# Altium PCB SPT3G_LCBoardRev5.PcbDoc (part 4 of 4)
Units mil, origin at the board's own origin, x right, y up, seen from the top; angles counter-clockwise.
Board outline 7275.33 x 1969 mil, 6 copper layers (Top Layer, Signal Layer 1, Internal Plane 1, Internal Plane 2, Signal Layer 2, Bottom Layer), stack 61.6 mil thick; 26 components, 141 nets, 668 pads, 146 vias.
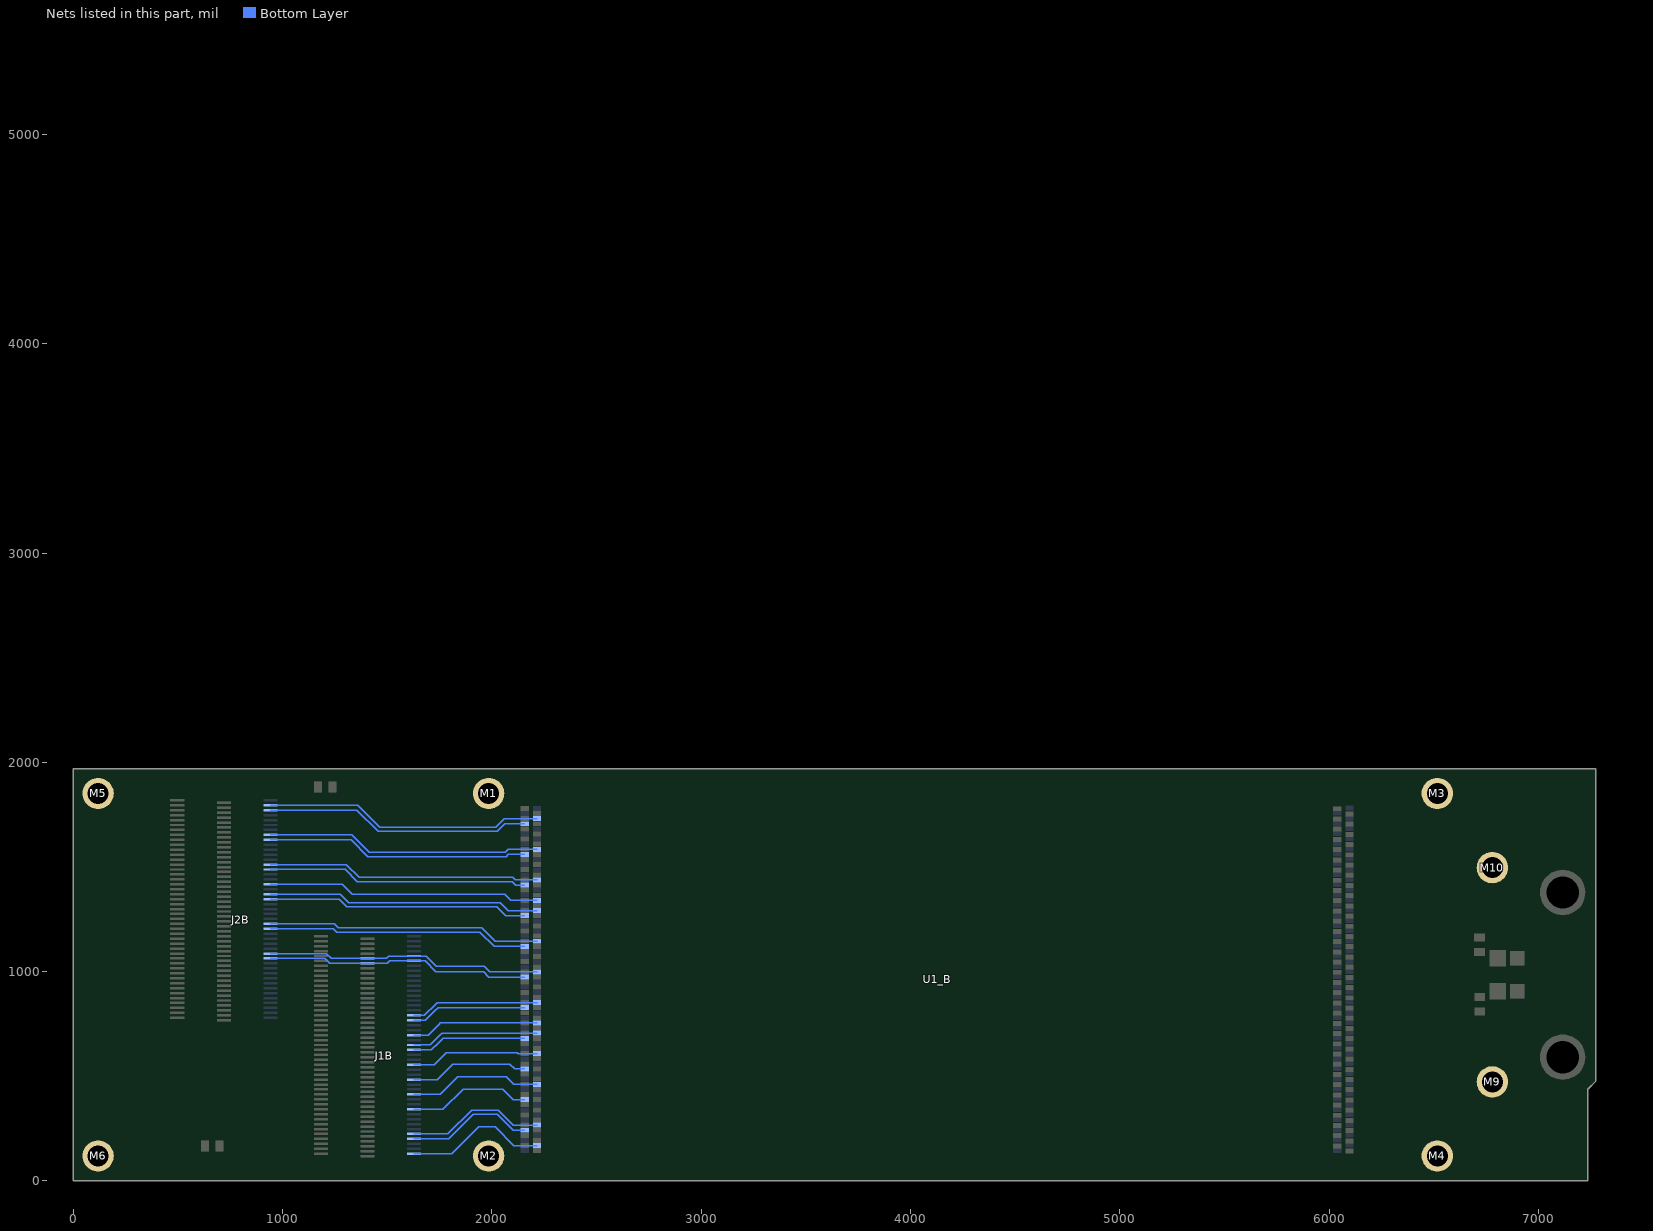
[diagram p8: the nets of this part, all layers, seen from the top]

## Via types
v1: diameter 20, hole 10, Top Layer to Bottom Layer, 136 vias
v2: diameter 50, hole 30, Top Layer to Bottom Layer, 10 vias

## Nets (pads, with @x,y where several pads share a name; then routed paths per layer and width w, separated by ;. In a path a pad name is that pad's centre, name@x,y a point inside that pad or via, vN(x,y) a via of type N, cw(c..) or ccw(c..) an arc to the next point about the centre after c; other vN are vias at no path point) (continued)
FREQB43: J1B.58 U1_B.30 | length 613.9
  Bottom Layer w6: J1B.58@1627.24,790.95 1677.54,790.95 1731.39,844.79 ; 2126.47,852.02 U1_B.30@2215.87,852.02
  Bottom Layer w6.01: 1731.39,844.79 1738.61,852.02 2126.47,852.02
FREQB44: J2B.56 U1_B.50 | length 1306.4
  Bottom Layer w6: J2B.56@941.26,1416.93 1284.68,1416.93 1332,1369.6 1978.77,1369.6 ; 2126.47,1340.2 U1_B.50@2215.87,1340.2
  Bottom Layer w6.01: 1978.77,1369.6 2060.31,1369.6 2089.71,1340.2 2126.47,1340.2
FREQB45: J1B.10 U1_B.6 | length 665.4
  Bottom Layer w6: J1B.10@1627.24,224.02 1789.43,224.02 1903.23,337.81 ; 2126.47,266.19 U1_B.6@2215.87,266.19
  Bottom Layer w6.01: 1903.23,337.81 2030.56,337.81 2102.18,266.19 2126.47,266.19
FREQB46: J1B.81 J1B.82 J2B.28 U1_B.36 | length 1320.7
  Bottom Layer w6: J2B.28@941.26,1086.22 1208.71,1086.22 1232.33,1062.6 1494.16,1062.6 1505.97,1074.41 1686.83,1074.41 1734.61,1026.63 ; 2126.47,998.47 U1_B.36@2215.87,998.47
  Bottom Layer w6.01: 1734.61,1026.63 1962.25,1026.63 1990.41,998.47 2126.47,998.47
FREQB47: J2B.40 U1_B.42 | length 1308.9
  Bottom Layer w6: J2B.40@941.26,1227.95 1247.38,1227.95 1266.65,1208.68 1470.06,1208.68 1470.28,1208.9 1643.81,1208.9 ; 1644.03,1208.68 1797.92,1208.68 ; 2126.47,1144.93 U1_B.42@2215.87,1144.93
  Bottom Layer w6.01: 1797.92,1208.68 1951.29,1208.68 2015.04,1144.93 2126.47,1144.93
FREQB48: J1B.38 U1_B.20 | length 614.6
  Bottom Layer w6: J1B.38@1627.24,554.72 1723.56,554.72 1752.53,583.7 ; 2126.47,607.92 U1_B.20@2215.87,607.92
  Bottom Layer w6.01: 1752.53,583.7 1781.52,612.68 2121.7,612.68 2126.47,607.92
FREQB49: J2B.52 U1_B.48 | length 1307
  Bottom Layer w6: J2B.52@941.26,1369.69 1275.35,1369.69 1315.44,1329.6 1978.77,1329.6 ; 2126.47,1291.39 U1_B.48@2215.87,1291.39
  Bottom Layer w6.01: 1978.77,1329.6 2038.89,1329.6 2077.1,1291.39 2126.47,1291.39
FREQB50: J1B.46 U1_B.24 | length 612
  Bottom Layer w6: J1B.46@1627.24,649.21 1704.91,649.21 1719.4,663.7 1720,663.7 1754.11,697.81 ; 2126.47,705.56 U1_B.24@2215.87,705.56
  Bottom Layer w6.01: 1754.11,697.81 1761.86,705.56 2126.47,705.56
FREQB51: J1B.2@1627.24,129.53 U1_B.2 | length 678.7
  Bottom Layer w6: J1B.2@1627.24,129.53 1808.08,129.53 1936.36,257.81 ; 2126.47,168.55 U1_B.2@2215.87,168.55
  Bottom Layer w6.01: 1936.36,257.81 2015.9,257.81 2105.16,168.55 2126.47,168.55
FREQB52: J2B.64 U1_B.54 | length 1305.1
  Bottom Layer w6: J2B.64@941.26,1511.42 1303.32,1511.42 1365.14,1449.6 1978.77,1449.6 ; 2126.47,1437.84 U1_B.54@2215.87,1437.84
  Bottom Layer w6.01: 1978.77,1449.6 2099.92,1449.6 2111.68,1437.84 2126.47,1437.84
FREQB53: J1B.50 U1_B.26 | length 612.6
  Bottom Layer w6: J1B.50@1627.24,696.46 1695.58,696.46 1702.83,703.7 1703.44,703.7 1748.81,749.07 ; 2126.47,754.38 U1_B.26@2215.87,754.38
  Bottom Layer w6.01: 1748.81,749.07 1754.11,754.38 2126.47,754.38
FREQB54: J2B.86 U1_B.65 | length 1272.9
  Bottom Layer w6: J2B.86@941.26,1771.26 1354.61,1771.26 1456.27,1669.6 1978.77,1669.6 ; 2126.47,1706.35 U1_B.65@2156.82,1706.35
  Bottom Layer w6.01: 1978.77,1669.6 2025.07,1669.6 2061.81,1706.35 2126.47,1706.35
FREQB55: J1B.56 U1_B.29 | length 554.5
  Bottom Layer w6: J1B.56@1627.24,767.32 1682.21,767.32 1727.81,812.93 ; 2126.47,827.61 U1_B.29@2156.82,827.61
  Bottom Layer w6.01: 1727.81,812.93 1742.49,827.61 2126.47,827.61
FREQB56: J2B.74 U1_B.59 | length 1252.9
  Bottom Layer w6: J2B.74@941.26,1629.53 1326.64,1629.53 1406.56,1549.6 1978.77,1549.6 ; 2126.47,1559.89 U1_B.59@2156.82,1559.89
  Bottom Layer w6.01: 1978.77,1549.6 2068.47,1549.6 2078.75,1559.89 2126.47,1559.89
FREQB57: J2B.76 U1_B.60 | length 1315.3
  Bottom Layer w6: J2B.76@941.26,1653.15 1331.3,1653.15 1414.85,1569.6 1978.77,1569.6 ; 2126.47,1584.3 U1_B.60@2215.87,1584.3
  Bottom Layer w6.01: 1978.77,1569.6 2062.6,1569.6 2077.3,1584.3 2126.47,1584.3
FREQB58: J1B.20 U1_B.11 | length 589.7
  Bottom Layer w6: J1B.20@1627.24,342.13 1766.12,342.13 1861.8,437.81 ; 2126.47,388.24 U1_B.11@2156.82,388.24
  Bottom Layer w6.01: 1861.8,437.81 2052.11,437.81 2101.68,388.24 2126.47,388.24
FREQB59: J1B.26 U1_B.14 | length 638.8
  Bottom Layer w6: J1B.26@1627.24,412.99 1752.14,412.99 1836.95,497.81 ; 2126.47,461.46 U1_B.14@2215.87,461.46
  Bottom Layer w6.01: 1836.95,497.81 2067.41,497.81 2103.75,461.46 2126.47,461.46
FREQB60: J2B.50 U1_B.47 | length 1248.3
  Bottom Layer w6: J2B.50@941.26,1346.06 1270.69,1346.06 1307.15,1309.6 1978.77,1309.6 ; 2126.47,1266.98 U1_B.47@2156.82,1266.98
  Bottom Layer w6.01: 1978.77,1309.6 2022.52,1309.6 2065.15,1266.98 2126.47,1266.98
FREQB61: J1B.32 U1_B.17 | length 569.8
  Bottom Layer w6: J1B.32@1627.24,483.86 1738.15,483.86 1812.1,557.81 ; 2126.47,534.69 U1_B.17@2156.82,534.69
  Bottom Layer w6.01: 1812.1,557.81 2085.93,557.81 2109.05,534.69 2126.47,534.69
FREQB62: J2B.38 U1_B.41 | length 1250.1
  Bottom Layer w6: J2B.38@941.26,1204.33 1242.72,1204.33 1258.37,1188.68 1478.34,1188.68 1478.56,1188.9 1635.53,1188.9 ; 1635.75,1188.68 1772.47,1188.68 ; 2126.47,1120.52 U1_B.41@2156.82,1120.52
  Bottom Layer w6.01: 1772.47,1188.68 1942.66,1188.68 2010.82,1120.52 2126.47,1120.52
FREQB63: J2B.62 U1_B.53 | length 1246.4
  Bottom Layer w6: J2B.62@941.26,1487.8 1298.66,1487.8 1356.86,1429.6 1978.77,1429.6 ; 2126.47,1413.43 U1_B.53@2156.82,1413.43
  Bottom Layer w6.01: 1978.77,1429.6 2097.29,1429.6 2113.46,1413.43 2126.47,1413.43
FREQB64: J2B.88 U1_B.66 | length 1335.3
  Bottom Layer w6: J2B.88@941.26,1794.88 1359.27,1794.88 1464.55,1689.6 1978.77,1689.6 ; 2126.47,1730.76 U1_B.66@2215.87,1730.76
  Bottom Layer w6.01: 1978.77,1689.6 2017.51,1689.6 2058.66,1730.76 2126.47,1730.76
FREQB65: J1B.8 U1_B.5 | length 609.7
  Bottom Layer w6: J1B.8@1627.24,200.39 1794.1,200.39 1911.51,317.81 ; 2126.47,241.78 U1_B.5@2156.82,241.78
  Bottom Layer w6.01: 1911.51,317.81 2024.74,317.81 2100.77,241.78 2126.47,241.78
FREQB66: J1B.44 U1_B.23 | length 552.6
  Bottom Layer w6: J1B.44@1627.24,625.59 1709.57,625.59 1727.68,643.7 1728.29,643.7 1762.39,677.81 ; 2126.47,681.15 U1_B.23@2156.82,681.15
  Bottom Layer w6.01: 1762.39,677.81 1765.74,681.15 2126.47,681.15
FREQB67: J1B.79 J1B.80 J2B.26 U1_B.35 | length 1262
  Bottom Layer w6: J2B.26@941.26,1062.6 1200.51,1062.6 1224.13,1038.98 J1B.79@1404.8,1038.98 1500.81,1038.98 1512.62,1050.79 J1B.80@1627.24,1050.79 1680.75,1050.79 1732.67,998.87 ; 2126.47,974.06 U1_B.35@2156.82,974.06
  Bottom Layer w6.01: 1732.67,998.87 1959.94,998.87 1984.75,974.06 2126.47,974.06
GND: M1.0 M2.0 M3.0 M4.0 M5.0 M6.0 M9.0 M10.0
pads on no net: J1A.2@435.35,1909.06 J1A.67 J1A.68 J1A.69 J1A.70 J1A.71 J1A.72 J1A.73 J1A.74 J1A.75 J1A.76 J1A.77 J1A.78 J1A.79 J1A.80 J1A.81 J1A.82 J1A.83 J1A.84 J1A.85 J1A.86 J1A.87 J1A.88 J1A.89 J1A.90 J1B.2@1343.78,27.17 J1B.67 J1B.68 J1B.69 J1B.70 J1B.71 J1B.72 J1B.73 J1B.74 J1B.75 J1B.76 J1B.77 J1B.78 J2A.2@1121.34,1259.45 J2A.13 J2A.14 J2A.15 J2A.16 J2A.17 J2A.18 J2A.19 J2A.20 J2A.21 J2A.22 J2A.23 J2A.24 J2B.1 J2B.2 J2B.3 J2B.4 J2B.5 J2B.6 J2B.7 J2B.8 J2B.9 J2B.10 J2B.11 J2B.12 J2B.13 J2B.14 J2B.15 J2B.16 J2B.17 J2B.18 J2B.19 J2B.20 J2B.21 J2B.22 J2B.23 J2B.24 M7.0 M8.0

## Polygon pours and split planes (outlines as drawn)
BOLOCOMBA on Top Layer "Top Layer-No Net" (solid, pour order 18): 6128.42,143.17 ccw(c6202.37,173.15) 6232.35,99.2 6232.59,98.88 ccw(c5439.8,960.49) 6232.59,1822.11 6232.35,1821.79 ccw(c6202.37,1747.83) 6128.42,1777.81
BOLORETURN_A on Signal Layer 1 "Top Layer-No Net" (solid, pour order 22): 6128.42,143.17 ccw(c6202.37,173.15) 6232.35,99.2 6232.59,98.88 ccw(c5439.8,960.49) 6232.59,1822.11 6232.35,1821.79 ccw(c6202.37,1747.83) 6128.42,1777.81
BOLORETURN_B on Signal Layer 2 "Top Layer-No Net" (solid, pour order 24): 6128.42,143.17 ccw(c6202.37,173.15) 6232.35,99.2 6232.59,98.88 ccw(c5439.8,960.49) 6232.59,1822.11 6232.35,1821.79 ccw(c6202.37,1747.83) 6128.42,1777.81
BOLOCOMBB on Bottom Layer "Top Layer-No Net" (solid, pour order 20): 6128.42,143.23 ccw(c6202.37,173.21) 6232.35,99.26 6232.59,98.93 ccw(c5439.8,960.55) 6232.59,1822.17 6232.35,1821.85 ccw(c6202.37,1747.89) 6128.42,1777.87
BOLORETURN_A on Internal Plane 1 (split plane): 6927.96,1036.1 6872.15,1036.1 6872.15,1091.9 6927.96,1091.9
GND on Internal Plane 1 (split plane): 7074.37,840.51 6905,840.51 6905,867.9 6933.06,867.9 6935.01,868.29 6936.66,869.4 6937.77,871.05 6938.15,873 6938.15,940 6937.77,941.95 6936.66,943.6 6935.01,944.71 6933.06,945.1 6905,945.1 6905,1025.9 6933.06,1025.9 6935.01,1026.29 6936.66,1027.4 6937.77,1029.05 6938.15,1031 6938.15,1097 6937.77,1098.95 6936.66,1100.6 6935.01,1101.71 6933.06,1102.1 6905,1102.1 6905,1130.37 7074.37,1130.37
BOLORETURN_B on Internal Plane 1 (split plane): 6927.96,878.1 6872.15,878.1 6872.15,934.9 6927.96,934.9
GND on Internal Plane 1 (split plane): 7255.24,485.32 7221.75,451.84 7219.25,448.8 7217.4,445.32 7216.25,441.55 7215.87,437.63 7215.87,20.1 20.1,20.1 20.1,1948.9 7255.24,1948.9
BOLORETURN_B on Internal Plane 2 (split plane): 6927.96,878.93 6872.15,878.93 6872.15,934.74 6927.96,934.74
GND on Internal Plane 2 (split plane): 7074.37,840.51 6905,840.51 6905,868.74 6933.06,868.74 6935.01,869.13 6936.66,870.23 6937.77,871.88 6938.15,873.84 6938.15,939.84 6937.77,941.79 6936.66,943.44 6935.01,944.55 6933.06,944.93 6905,944.93 6905,1025.9 6933.06,1025.9 6935.01,1026.29 6936.66,1027.4 6937.77,1029.05 6938.15,1031 6938.15,1097 6937.77,1098.95 6936.66,1100.6 6935.01,1101.71 6933.06,1102.1 6905,1102.1 6905,1130.37 7074.37,1130.37
BOLORETURN_A on Internal Plane 2 (split plane): 6927.96,1036.1 6872.15,1036.1 6872.15,1091.9 6927.96,1091.9
GND on Internal Plane 2 (split plane): 7255.24,485.32 7221.75,451.84 7219.25,448.8 7217.4,445.32 7216.25,441.55 7215.87,437.63 7215.87,20.1 20.1,20.1 20.1,1948.9 7255.24,1948.9

## Keep-outs
Keep-Out Layer:
  circle w1: c7116.56,1378.2 r124
  circle w1: c7116.56,590.8 r124
  lines w1: 2734.99,2196.95 3985.63,3447.58 ; 2734.99,2256.95 3925.63,3447.58 ; 2734.99,2316.95 3865.63,3447.58 ; 2734.99,2376.95 3805.63,3447.58 ; 2734.99,2436.95 3745.63,3447.58 ; 2734.99,2496.95 3685.63,3447.58 ; 2734.99,2556.95 3625.63,3447.58 ; 2734.99,2616.95 3565.63,3447.58 ; 2734.99,2676.95 3505.63,3447.58 ; 2734.99,2736.95 3445.63,3447.58 ; 2734.99,2796.95 3385.63,3447.58 ; 2734.99,2856.95 3325.63,3447.58 ; 2734.99,2916.95 3265.63,3447.58 ; 2734.99,2976.95 3205.63,3447.58 ; 2734.99,3036.95 3145.63,3447.58 ; 2734.99,3096.95 3085.63,3447.58 ; 2734.99,3156.95 3025.63,3447.58 ; 2734.99,3216.95 2965.63,3447.58 ; 2734.99,3276.95 2905.63,3447.58 ; 2734.99,3336.95 2845.63,3447.58 ; 2734.99,3396.95 2785.63,3447.58 ; 2763.22,2165.17 4045.63,3447.58 ; 2823.22,2165.17 4105.63,3447.58 ; 2883.22,2165.17 4165.63,3447.58 ; 2943.22,2165.17 4225.63,3447.58 ; 3003.22,2165.17 4285.63,3447.58 ; 3063.22,2165.17 4345.63,3447.58 ; 3123.22,2165.17 4405.63,3447.58 ; 3183.22,2165.17 4465.63,3447.58 ; 3243.22,2165.17 4525.63,3447.58 ; 3303.22,2165.17 4585.63,3447.58 ; 3363.22,2165.17 4645.63,3447.58 ; 3423.22,2165.17 4705.63,3447.58 ; 3483.22,2165.17 4765.63,3447.58 ; 3543.22,2165.17 4825.63,3447.58 ; 3603.22,2165.17 4885.63,3447.58 ; 3663.22,2165.17 4945.63,3447.58 ; 3723.22,2165.17 5005.63,3447.58 ; 3783.22,2165.17 5065.63,3447.58 ; 3843.22,2165.17 5125.63,3447.58 ; 3903.22,2165.17 5185.63,3447.58 ; 3963.22,2165.17 5245.63,3447.58 ; 4023.22,2165.17 5305.63,3447.58 ; 4083.22,2165.17 5365.63,3447.58 ; 4143.22,2165.17 5425.63,3447.58 ; 4203.22,2165.17 5485.63,3447.58 ; 4263.22,2165.17 5545.63,3447.58 ; 4323.22,2165.17 5605.63,3447.58 ; 4383.22,2165.17 5665.63,3447.58 ; 4443.22,2165.17 5725.63,3447.58 ; 4503.22,2165.17 5785.63,3447.58 ; 4563.22,2165.17 5845.63,3447.58 ; 4623.22,2165.17 5905.63,3447.58 ; 4683.22,2165.17 5965.63,3447.58 ; 4743.22,2165.17 6025.63,3447.58 ; 4803.22,2165.17 6085.63,3447.58 ; 4863.22,2165.17 6145.63,3447.58 ; 4923.22,2165.17 6205.63,3447.58 ; 4983.22,2165.17 6265.63,3447.58 ; 5043.22,2165.17 6325.63,3447.58 ; 5103.22,2165.17 6385.63,3447.58 ; 5163.22,2165.17 6445.63,3447.58 ; 5223.22,2165.17 6505.63,3447.58 ; 5283.22,2165.17 6565.63,3447.58 ; 5343.22,2165.17 6625.63,3447.58 ; 5403.22,2165.17 6685.63,3447.58 ; 5463.22,2165.17 6745.63,3447.58 ; 5523.22,2165.17 6805.63,3447.58 ; 5583.22,2165.17 6865.63,3447.58 ; 5643.22,2165.17 6925.63,3447.58 ; 5703.22,2165.17 6985.63,3447.58 ; 5763.22,2165.17 7045.63,3447.58 ; 5823.22,2165.17 7105.63,3447.58 ; 5883.22,2165.17 7165.63,3447.58 ; 5943.22,2165.17 7225.63,3447.58 ; 6003.22,2165.17 7285.63,3447.58 ; 6063.22,2165.17 7345.63,3447.58 ; 6123.22,2165.17 7383.76,3425.72 ; 6183.22,2165.17 7383.76,3365.72 ; 6243.22,2165.17 7383.76,3305.72 ; 6264.08,3497.36 6363.76,3597.04 6483.76,3717.04 6603.76,3837.04 6723.76,3957.04 6843.76,4077.04 6963.76,4197.04 7083.76,4317.04 7203.76,4437.04 7323.76,4557.04 7383.76,4617.04 ; 6264.08,3557.36 6303.76,3597.04 6423.76,3717.04 6543.76,3837.04 6663.76,3957.04 6783.76,4077.04 6903.76,4197.04 7023.76,4317.04 7143.76,4437.04 7263.76,4557.04 7383.76,4677.04 ; 6264.08,3617.36 6363.76,3717.04 6483.76,3837.04 6603.76,3957.04 6723.76,4077.04 6843.76,4197.04 6963.76,4317.04 7083.76,4437.04 7203.76,4557.04 7323.76,4677.04 7383.76,4737.04 ; 6264.08,3677.36 6303.76,3717.04 6423.76,3837.04 6543.76,3957.04 6663.76,4077.04 6783.76,4197.04 6903.76,4317.04 7023.76,4437.04 7143.76,4557.04 7263.76,4677.04 7383.76,4797.04 ; 6264.08,3737.36 6363.76,3837.04 6483.76,3957.04 6603.76,4077.04 6723.76,4197.04 6843.76,4317.04 6963.76,4437.04 7083.76,4557.04 7203.76,4677.04 7323.76,4797.04 7383.76,4857.04 ; 6264.08,3797.36 6303.76,3837.04 6423.76,3957.04 6543.76,4077.04 6663.76,4197.04 6783.76,4317.04 6903.76,4437.04 7023.76,4557.04 7143.76,4677.04 7263.76,4797.04 7383.76,4917.04 ; 6264.08,3857.36 6363.76,3957.04 6483.76,4077.04 6603.76,4197.04 6723.76,4317.04 6843.76,4437.04 6963.76,4557.04 7083.76,4677.04 7203.76,4797.04 7323.76,4917.04 7383.76,4977.04 ; 6264.08,3917.36 6303.76,3957.04 6423.76,4077.04 6543.76,4197.04 6663.76,4317.04 6783.76,4437.04 6903.76,4557.04 7023.76,4677.04 7143.76,4797.04 7263.76,4917.04 7383.76,5037.04 ; 6264.08,3977.36 6363.76,4077.04 6483.76,4197.04 6603.76,4317.04 6723.76,4437.04 6843.76,4557.04 6963.76,4677.04 7083.76,4797.04 7203.76,4917.04 7323.76,5037.04 7383.76,5097.04 ; 6264.08,4037.36 6303.76,4077.04 6423.76,4197.04 6543.76,4317.04 6663.76,4437.04 6783.76,4557.04 6903.76,4677.04 7023.76,4797.04 7143.76,4917.04 7263.76,5037.04 7383.76,5157.04 ; 6264.08,4097.36 6363.76,4197.04 6483.76,4317.04 6603.76,4437.04 6723.76,4557.04 6843.76,4677.04 6963.76,4797.04 7083.76,4917.04 7203.76,5037.04 7323.76,5157.04 7383.76,5217.04 ; 6264.08,4157.36 6303.76,4197.04 6423.76,4317.04 6543.76,4437.04 6663.76,4557.04 6783.76,4677.04 6903.76,4797.04 7023.76,4917.04 7143.76,5037.04 7263.76,5157.04 7383.76,5277.04 ; 6264.08,4217.36 6363.76,4317.04 6483.76,4437.04 6603.76,4557.04 6723.76,4677.04 6843.76,4797.04 6963.76,4917.04 7083.76,5037.04 7203.76,5157.04 7323.76,5277.04 ; 6264.08,4277.36 6303.76,4317.04 6423.76,4437.04 6543.76,4557.04 6663.76,4677.04 6783.76,4797.04 6903.76,4917.04 7023.76,5037.04 7143.76,5157.04 7263.76,5277.04 ; 6264.08,4337.36 6363.76,4437.04 6483.76,4557.04 6603.76,4677.04 6723.76,4797.04 6843.76,4917.04 6963.76,5037.04 7083.76,5157.04 7203.76,5277.04 ; 6264.08,4397.36 6303.76,4437.04 6423.76,4557.04 6543.76,4677.04 6663.76,4797.04 6783.76,4917.04 6903.76,5037.04 7023.76,5157.04 7143.76,5277.04 ; 6264.08,4457.36 6363.76,4557.04 6483.76,4677.04 6603.76,4797.04 6723.76,4917.04 6843.76,5037.04 6963.76,5157.04 7083.76,5277.04 ; 6264.08,4517.36 6303.76,4557.04 6423.76,4677.04 6543.76,4797.04 6663.76,4917.04 6783.76,5037.04 6903.76,5157.04 7023.76,5277.04 ; 6264.08,4577.36 6363.76,4677.04 6483.76,4797.04 6603.76,4917.04 6723.76,5037.04 6843.76,5157.04 6963.76,5277.04 ; 6264.08,4637.36 6303.76,4677.04 6423.76,4797.04 6543.76,4917.04 6663.76,5037.04 6783.76,5157.04 6903.76,5277.04 ; 6264.08,4697.36 6363.76,4797.04 6483.76,4917.04 6603.76,5037.04 6723.76,5157.04 6843.76,5277.04 ; 6264.08,4757.36 6303.76,4797.04 6423.76,4917.04 6543.76,5037.04 6663.76,5157.04 6783.76,5277.04 ; 6264.08,4817.36 6363.76,4917.04 6483.76,5037.04 6603.76,5157.04 6723.76,5277.04 ; 6264.08,4877.36 6303.76,4917.04 6423.76,5037.04 6543.76,5157.04 6663.76,5277.04 ; 6264.08,4937.36 6363.76,5037.04 6483.76,5157.04 6603.76,5277.04 ; 6264.08,4997.36 6303.76,5037.04 6423.76,5157.04 6543.76,5277.04 ; 6264.08,5057.36 6363.76,5157.04 6483.76,5277.04 ; 6264.08,5117.36 6303.76,5157.04 6423.76,5277.04 ; 6264.08,5177.36 6363.76,5277.04 ; 6264.08,5237.36 6303.76,5277.04 ; 6303.22,2165.17 7383.76,3245.72 ; 6303.76,3477.04 6423.76,3597.04 6543.76,3717.04 6663.76,3837.04 6783.76,3957.04 6903.76,4077.04 7023.76,4197.04 7143.76,4317.04 7263.76,4437.04 7383.76,4557.04 ; 6363.22,2165.17 7383.76,3185.72 ; 6363.76,3477.04 6483.76,3597.04 6603.76,3717.04 6723.76,3837.04 6843.76,3957.04 6963.76,4077.04 7083.76,4197.04 7203.76,4317.04 7323.76,4437.04 7383.76,4497.04 ; 6423.22,2165.17 7383.76,3125.72 ; 6423.76,3477.04 6543.76,3597.04 6663.76,3717.04 6783.76,3837.04 6903.76,3957.04 7023.76,4077.04 7143.76,4197.04 7263.76,4317.04 7383.76,4437.04 ; 6483.22,2165.17 7383.76,3065.72 ; 6483.76,3477.04 6603.76,3597.04 6723.76,3717.04 6843.76,3837.04 6963.76,3957.04 7083.76,4077.04 7203.76,4197.04 7323.76,4317.04 7383.76,4377.04 ; 6543.22,2165.17 7383.76,3005.72 ; 6543.76,3477.04 6663.76,3597.04 6783.76,3717.04 6903.76,3837.04 7023.76,3957.04 7143.76,4077.04 7263.76,4197.04 7383.76,4317.04 ; 6603.22,2165.17 7383.76,2945.72 ; 6603.76,3477.04 6723.76,3597.04 6843.76,3717.04 6963.76,3837.04 7083.76,3957.04 7203.76,4077.04 7323.76,4197.04 7383.76,4257.04 ; 6663.22,2165.17 7383.76,2885.72 ; 6663.76,3477.04 6783.76,3597.04 6903.76,3717.04 7023.76,3837.04 7143.76,3957.04 7263.76,4077.04 7383.76,4197.04 ; 6723.22,2165.17 7383.76,2825.72 ; 6723.76,3477.04 6843.76,3597.04 6963.76,3717.04 7083.76,3837.04 7203.76,3957.04 7323.76,4077.04 7383.76,4137.04 ; 6783.22,2165.17 7383.76,2765.72 ; 6783.76,3477.04 6903.76,3597.04 7023.76,3717.04 7143.76,3837.04 7263.76,3957.04 7383.76,4077.04 ; 6843.22,2165.17 7383.76,2705.72 ; 6843.76,3477.04 6963.76,3597.04 7083.76,3717.04 7203.76,3837.04 7323.76,3957.04 7383.76,4017.04 ; 6903.22,2165.17 7383.76,2645.72 ; 6903.76,3477.04 7023.76,3597.04 7143.76,3717.04 7263.76,3837.04 7383.76,3957.04 ; 6963.22,2165.17 7383.76,2585.72 ; 6963.76,3477.04 7083.76,3597.04 7203.76,3717.04 7323.76,3837.04 7383.76,3897.04 ; 7023.22,2165.17 7383.76,2525.72 ; 7023.76,3477.04 7143.76,3597.04 7263.76,3717.04 7383.76,3837.04 ; 7083.22,2165.17 7383.76,2465.72 ; 7083.76,3477.04 7203.76,3597.04 7323.76,3717.04 7383.76,3777.04 ; 7143.22,2165.17 7383.76,2405.72 ; 7143.76,3477.04 7263.76,3597.04 7383.76,3717.04 ; 7203.22,2165.17 7383.76,2345.72 ; 7203.76,3477.04 7323.76,3597.04 7383.76,3657.04 ; 7263.22,2165.17 7383.76,2285.72 ; 7263.76,3477.04 7383.76,3597.04 ; 7323.22,2165.17 7383.76,2225.72 ; 7323.76,3477.04 7383.76,3537.04
  lines w3: 0,0 0,1969 7275.33,1969 7275.33,477 7235.96,437.63 7235.96,406 7235.96,0 0,0
  lines w15: 2734.99,3597.04 3144.91,3597.04 4184.61,3597.04 5044.38,3597.04 5694.22,3597.04 6264.08,3597.04 7383.76,3597.04 ; 2734.99,3717.04 3144.91,3717.04 4184.61,3717.04 5044.38,3717.04 5694.22,3717.04 6264.08,3717.04 7383.76,3717.04 ; 2734.99,3837.04 3144.91,3837.04 4184.61,3837.04 5044.38,3837.04 5694.22,3837.04 6264.08,3837.04 7383.76,3837.04 ; 2734.99,3957.04 3144.91,3957.04 4184.61,3957.04 5044.38,3957.04 5694.22,3957.04 6264.08,3957.04 7383.76,3957.04 ; 2734.99,4077.04 3144.91,4077.04 4184.61,4077.04 5044.38,4077.04 5694.22,4077.04 6264.08,4077.04 7383.76,4077.04 ; 2734.99,4197.04 3144.91,4197.04 4184.61,4197.04 5044.38,4197.04 5694.22,4197.04 6264.08,4197.04 7383.76,4197.04 ; 2734.99,4317.04 3144.91,4317.04 4184.61,4317.04 5044.38,4317.04 5694.22,4317.04 6264.08,4317.04 7383.76,4317.04 ; 2734.99,4437.04 3144.91,4437.04 4184.61,4437.04 5044.38,4437.04 5694.22,4437.04 6264.08,4437.04 7383.76,4437.04 ; 2734.99,4557.04 3144.91,4557.04 4184.61,4557.04 5044.38,4557.04 5694.22,4557.04 6264.08,4557.04 7383.76,4557.04 ; 2734.99,4677.04 3144.91,4677.04 4184.61,4677.04 5044.38,4677.04 5694.22,4677.04 6264.08,4677.04 7383.76,4677.04 ; 2734.99,4797.04 3144.91,4797.04 4184.61,4797.04 5044.38,4797.04 5694.22,4797.04 6264.08,4797.04 7383.76,4797.04 ; 2734.99,4917.04 3144.91,4917.04 4184.61,4917.04 5044.38,4917.04 5694.22,4917.04 6264.08,4917.04 7383.76,4917.04 ; 2734.99,5037.04 3144.91,5037.04 4184.61,5037.04 5044.38,5037.04 5694.22,5037.04 6264.08,5037.04 7383.76,5037.04 ; 2734.99,5157.04 3144.91,5157.04 4184.61,5157.04 5044.38,5157.04 5694.22,5157.04 6264.08,5157.04 7383.76,5157.04 ; 2734.99,5277.04 7383.76,5277.04 ; 3144.91,5397.04 3144.91,3477.04 ; 4184.61,5397.04 4184.61,3477.04 ; 5044.38,5397.04 5044.38,3477.04 ; 5694.22,5397.04 5694.22,3477.04 ; 6264.08,5397.04 6264.08,3477.04 ; 3144.91,3477.04 2734.99,3477.04 2734.99,5397.04 7383.76,5397.04 7383.76,3477.04 6264.08,3477.04 ; 3144.91,3477.04 4184.61,3477.04 ; 4184.61,3477.04 5044.38,3477.04 ; 5044.38,3477.04 5694.22,3477.04 ; 5694.22,3477.04 6264.08,3477.04 ; 2734.99,2165.72 7383.76,2165.72 7383.76,3447.04 2734.99,3447.04 2734.99,2165.72
  text "Layer" at 2794.99,5307.04 h60
  text "Name" at 3204.91,5307.04 h60
  text "Material" at 4244.61,5307.04 h60
  text "Thickness" at 5104.38,5307.04 h60
  text "Constant" at 5754.22,5307.04 h60
  text "Board Layer Stack" at 6324.08,5307.04 h60
  text "1" at 2794.99,5187.04 h60
  text "Top Overlay" at 3204.91,5187.04 h60
  text "2" at 2794.99,5067.04 h60
  text "Top Solder" at 3204.91,5067.04 h60
  text "Solder Resist" at 4244.61,5067.04 h60
  text "0.40mil" at 5104.38,5067.04 h60
  text "3.5" at 5754.22,5067.04 h60
  text "3" at 2794.99,4947.04 h60
  text "Top Layer" at 3204.91,4947.04 h60
  text "Copper" at 4244.61,4947.04 h60
  text "1.40mil" at 5104.38,4947.04 h60
  text "4" at 2794.99,4827.04 h60
  text "Dielectric 1" at 3204.91,4827.04 h60
  text "FR-4" at 4244.61,4827.04 h60
  text "4.00mil" at 5104.38,4827.04 h60
  text "4.2" at 5754.22,4827.04 h60
  text "5" at 2794.99,4707.04 h60
  text "Signal Layer 1" at 3204.91,4707.04 h60
  text "Copper" at 4244.61,4707.04 h60
  text "0.70mil" at 5104.38,4707.04 h60
  text "6" at 2794.99,4587.04 h60
  text "Dielectric 3" at 3204.91,4587.04 h60
  text "9.00mil" at 5104.38,4587.04 h60
  text "4.2" at 5754.22,4587.04 h60
  text "7" at 2794.99,4467.04 h60
  text "Internal Plane 1" at 3204.91,4467.04 h60
  text "Copper" at 4244.61,4467.04 h60
  text "0.70mil" at 5104.38,4467.04 h60
  text "8" at 2794.99,4347.04 h60
  text "Dielectric 4" at 3204.91,4347.04 h60
  text "30.00mil" at 5104.38,4347.04 h60
  text "4.2" at 5754.22,4347.04 h60
  text "9" at 2794.99,4227.04 h60
  text "Internal Plane 2" at 3204.91,4227.04 h60
  text "Copper" at 4244.61,4227.04 h60
  text "0.70mil" at 5104.38,4227.04 h60
  text "10" at 2794.99,4107.04 h60
  text "Dielectric 5" at 3204.91,4107.04 h60
  text "9.00mil" at 5104.38,4107.04 h60
  text "4.2" at 5754.22,4107.04 h60
  text "11" at 2794.99,3987.04 h60
  text "Signal Layer 2" at 3204.91,3987.04 h60
  text "Copper" at 4244.61,3987.04 h60
  text "0.70mil" at 5104.38,3987.04 h60
  text "12" at 2794.99,3867.04 h60
  text "Dielectric 2" at 3204.91,3867.04 h60
  text "4.00mil" at 5104.38,3867.04 h60
  text "4.2" at 5754.22,3867.04 h60
  text "13" at 2794.99,3747.04 h60
  text "Bottom Layer" at 3204.91,3747.04 h60
  text "Copper" at 4244.61,3747.04 h60
  text "1.40mil" at 5104.38,3747.04 h60
  text "14" at 2794.99,3627.04 h60
  text "Bottom Solder" at 3204.91,3627.04 h60
  text "Solder Resist" at 4244.61,3627.04 h60
  text "0.40mil" at 5104.38,3627.04 h60
  text "3.5" at 5754.22,3627.04 h60
  text "15" at 2794.99,3507.04 h60
  text "Bottom Overlay" at 3204.91,3507.04 h60

## Other copper
Top Layer:
  rectangle net BOLORETURN_A: 6668.08,1141.74 6908,1311.34
  rectangle net BOLORETURN_B: 6674.85,662.6 6904,832.2
  text "Top Layer" at 6449.31,4948.36 h60
  text "100 Ohm - Differential" at 2881.8,3279.79 h60
  text "Top layer and Mid layer 1 - 6mil parallel traces over ground plane 1" at 3050.36,3149.29 h60
  text "Bottom layer and Mid layer 2 - 6mil parallel traces over ground plane 2" at 3050.36,3013.36 h60
  text "Special Mechanical layers:" at -176,3012 h157.48
  text "50 Ohm - single ended" at 2865.49,2877.43 h60
  text "Mechanical layers 3 and 4" at -114,2791 h60
  text "Mid layer 1 - 12mil traces" at 3077.55,2719.74 h60
  text "Define regions were no tinning must occur" at 233,2649 h60
  text "Mid layer 2 - 12mil traces" at 3069.38,2597.19 h60
  text "Mechanical layer 5 indicates cutout and board outline" at -101,2450 h60
Signal Layer 1:
  rectangle net BOLORETURN_A: 6554.76,1139.07 6909,1311.61
  text "Mid Layer 1" at 6448.49,4700.22 h60
Signal Layer 2:
  rectangle net BOLORETURN_B: 6549.26,661.39 6905.51,833.93
  text "Mid Layer 2" at 6421.3,3977.05 h60
Bottom Layer:
  rectangle net BOLORETURN_A: 6669,1008.81 6909.13,1310.52
  rectangle net BOLORETURN_B: 6676,662 6905.11,962.83
  text "Bottom Layer" at 6465.62,3735.84 h60
Internal Plane 1 (plane layer: these items are gaps in the copper):
  lines w10: 6899.91,873 6899.91,835.77 6900.26,835.42 7079.47,835.42 7079.47,1135.47 6899.91,1135.47 6899.91,1097 ; 6899.91,940 6899.91,1029.7 ; 6867.06,873 6933.06,873 6933.06,940 6867.06,940 6867.06,873 ; 6867.06,1031 6933.06,1031 6933.06,1097 6867.06,1097 6867.06,1031
  text "Ground Plane 1 (Gnd)" at 6263.83,4465.13 h60
Internal Plane 2 (plane layer: these items are gaps in the copper):
  lines w10: 6899.91,835.77 6899.91,873 ; 6899.91,940 6899.91,1029.7 ; 6899.91,1098 6899.91,1135.47 7079.46,1135.47 7079.47,835.42 6900.26,835.42 ; 6867.06,873.84 6867.06,939.84 6933.06,939.84 6933.06,873.84 6867.06,873.84 ; 6867.06,1031 6933.06,1031 6933.06,1097 6867.06,1097 6867.06,1031
  text "Ground Plane 2 (Gnd)" at 6263.83,4209.57 h60

## Silkscreen, mask and mechanical layers (free items; w line width, h text height)
Top Overlay:
  lines w10: 6899.91,835.77 6899.91,873 ; 6899.91,940 6899.91,1029.7 ; 6899.91,1096.15 6899.91,1135.47 7079.46,1135.47 7079.47,835.42 6900.26,835.42
  text "Top Silk" at 6546.57,5182.86 h60
  text "1" at 385.22,1866.5 h60
  text "1" at 1085.97,1227.42 h60
  text "CombA+" at 6926.75,1179.55 h60
  text "Cut out / Castellated Vias" at 7039.06,840.51 h20 r90
  text "CombB+" at 6926.75,739.17 h60
  text "adamjohngilbert@gmail.com" at 973.87,115.36 h60 r90
  text "Amy Bender" at 924.73,111.15 h60 r90
  text "SPT3G LC Board Rev5B" at 889.57,38 h60 r90
Bottom Overlay:
  text "Bottom Silk" at 6513.94,3502.72 h60
  text "ReturnA-" at 7149.83,1181.81 h60
  text "ReturnB-" at 7149.83,739.87 h60
  text "1" at 607.72,714.45 h60 r180
  text "adamjohngilbert@gmail.com" at 366.07,159.97 h60 r270
  text "SPT3G LC Board Rev5B" at 462.94,158.56 h60 r270
  text "Amy Bender" at 415.21,155.75 h60 r270
  text "1" at 1299.16,80.21 h60 r180
Bottom Solder:
  rectangle: 6828,871.84 6935,941.84
  rectangle: 6828,1029 6935,1099
Mechanical 1:
  lines w6.01: 6232.35,99.2 cw(c6202.37,173.15) 6128.42,143.17 6128.42,1777.81 cw(c6202.37,1747.83) 6232.35,1821.79 ; 6232.59,98.88 ccw(c5439.8,960.49) 6232.59,1822.11
Mechanical 2:
  lines w10: 1850.44,183.27 1870.44,123.27 ; 1850.44,1795.27 1870.44,1855.27 ; 1860.44,123.27 1880.44,123.27 ; 1860.44,1855.27 1880.44,1855.27 ; 1870.44,713.36 1870.44,123.27 ; 1870.44,1265.19 1870.44,1855.27 ; 1890.44,183.27 1870.44,123.27 ; 1890.44,1795.27 1870.44,1855.27 ; 6638.72,0.39 6638.72,1969
  text "Press-in Nut" at 7298,1431 h60
  text "Shield" at 6669,1358 h20 r90
  text "1732 (mil)" at 1906.43,723.36 h60 r90
  text "Press-in Nut" at 7263,481 h60
Mechanical 3:
  rectangle: 6004.17,18.3 6132.83,1943.57
  rectangle: 2121.97,19.3 2250.63,1944.57
  text "NO TOP SIDE TINNING IN HIGHLIGHTED REGIONS" at 1172.98,2138.46 h100
Mechanical 4:
  rectangle: 6004.17,18.3 6132.83,1943.57
  rectangle: 2121.97,19.3 2250.63,1944.57
  text "NO BOTTOM SIDE TINNING IN HIGHLIGHTED REGIONS" at 1178.6,2265 h100
Mechanical 5:
  lines w3: 7079.46,1135.47 6899.91,1135.47 6899.91,835.06 6900.26,835.42 7079.47,835.42 7079.47,1135.47 ; 7079.46,1135.47 7079.47,1135.47 ; 0,0 0,1969 7275.33,1969 7275.33,477 7235.96,437.63 7235.96,0 0,0
  text "Cut out / Castellated Vias" at 7039.06,840 h20 r90
  text "Board outline" at 6560,-80 h20

## Dimensions
6682.5,910.25 to 6757.5,910.25 on Mechanical 2
6682.5,777.75 to 7275.33,0 on Mechanical 2
6681.5,1061.75 to 6681.5,1194.25 on Mechanical 2
6681.5,1061.75 to 7275.33,0.39 on Mechanical 2
7079.47,1135.47 to 7275.33,1969 on Mechanical 2
6899.91,1135.47 to 6900.26,835.42 on Mechanical 2
6899.91,873 to 7079.47,835.42 on Mechanical 2
7116.56,1378.2 to 7275.33,1969 on Mechanical 2
7116.56,590.8 to 7116.56,1378.2 on Mechanical 2
118.11,1851 to 0,1969 on Mechanical 2
6517.28,1851 to 7275.33,1969 on Mechanical 2
6517.28,119.02 to 7275.33,0 on Mechanical 2
1984.28,119.02 to 0,0 on Mechanical 2
118.11,119.02 to 0,0 on Mechanical 2
118.11,119.02 to 0,0 on Mechanical 2
118.11,1851 to 0,1969 on Mechanical 2
-0.35,1851.76 to 6517.28,1851 on Mechanical 2
0,1969 to 7275.33,1969 on Mechanical 2
447.17,684.65 to 1133.15,35.04 on Mechanical 2
1133.15,35.04 to 447.17,684.65 on Mechanical 2
1984.28,119 to 1678.43,35.04 on Mechanical 2
6638.72,1969 to 7275.33,1969 on Mechanical 2
6780.33,1496.56 to 7275.33,1969 on Mechanical 2
6780.33,1496.56 to 7275.33,1969 on Mechanical 2
6780.33,472.83 to 7235.96,0 on Mechanical 2
6780.33,472.83 to 7275.33,477 on Mechanical 2